# Altium PCB GSH_3dprint_Bed12V_final.PcbDoc (part 2 of 2)
Units mm, origin at the board's own origin, x right, y up, seen from the top; angles counter-clockwise.
Board outline 125 x 120 mm, 2 copper layers (Top Layer, Bottom Layer); 5 components, 3 nets, 10 pads, 0 vias.
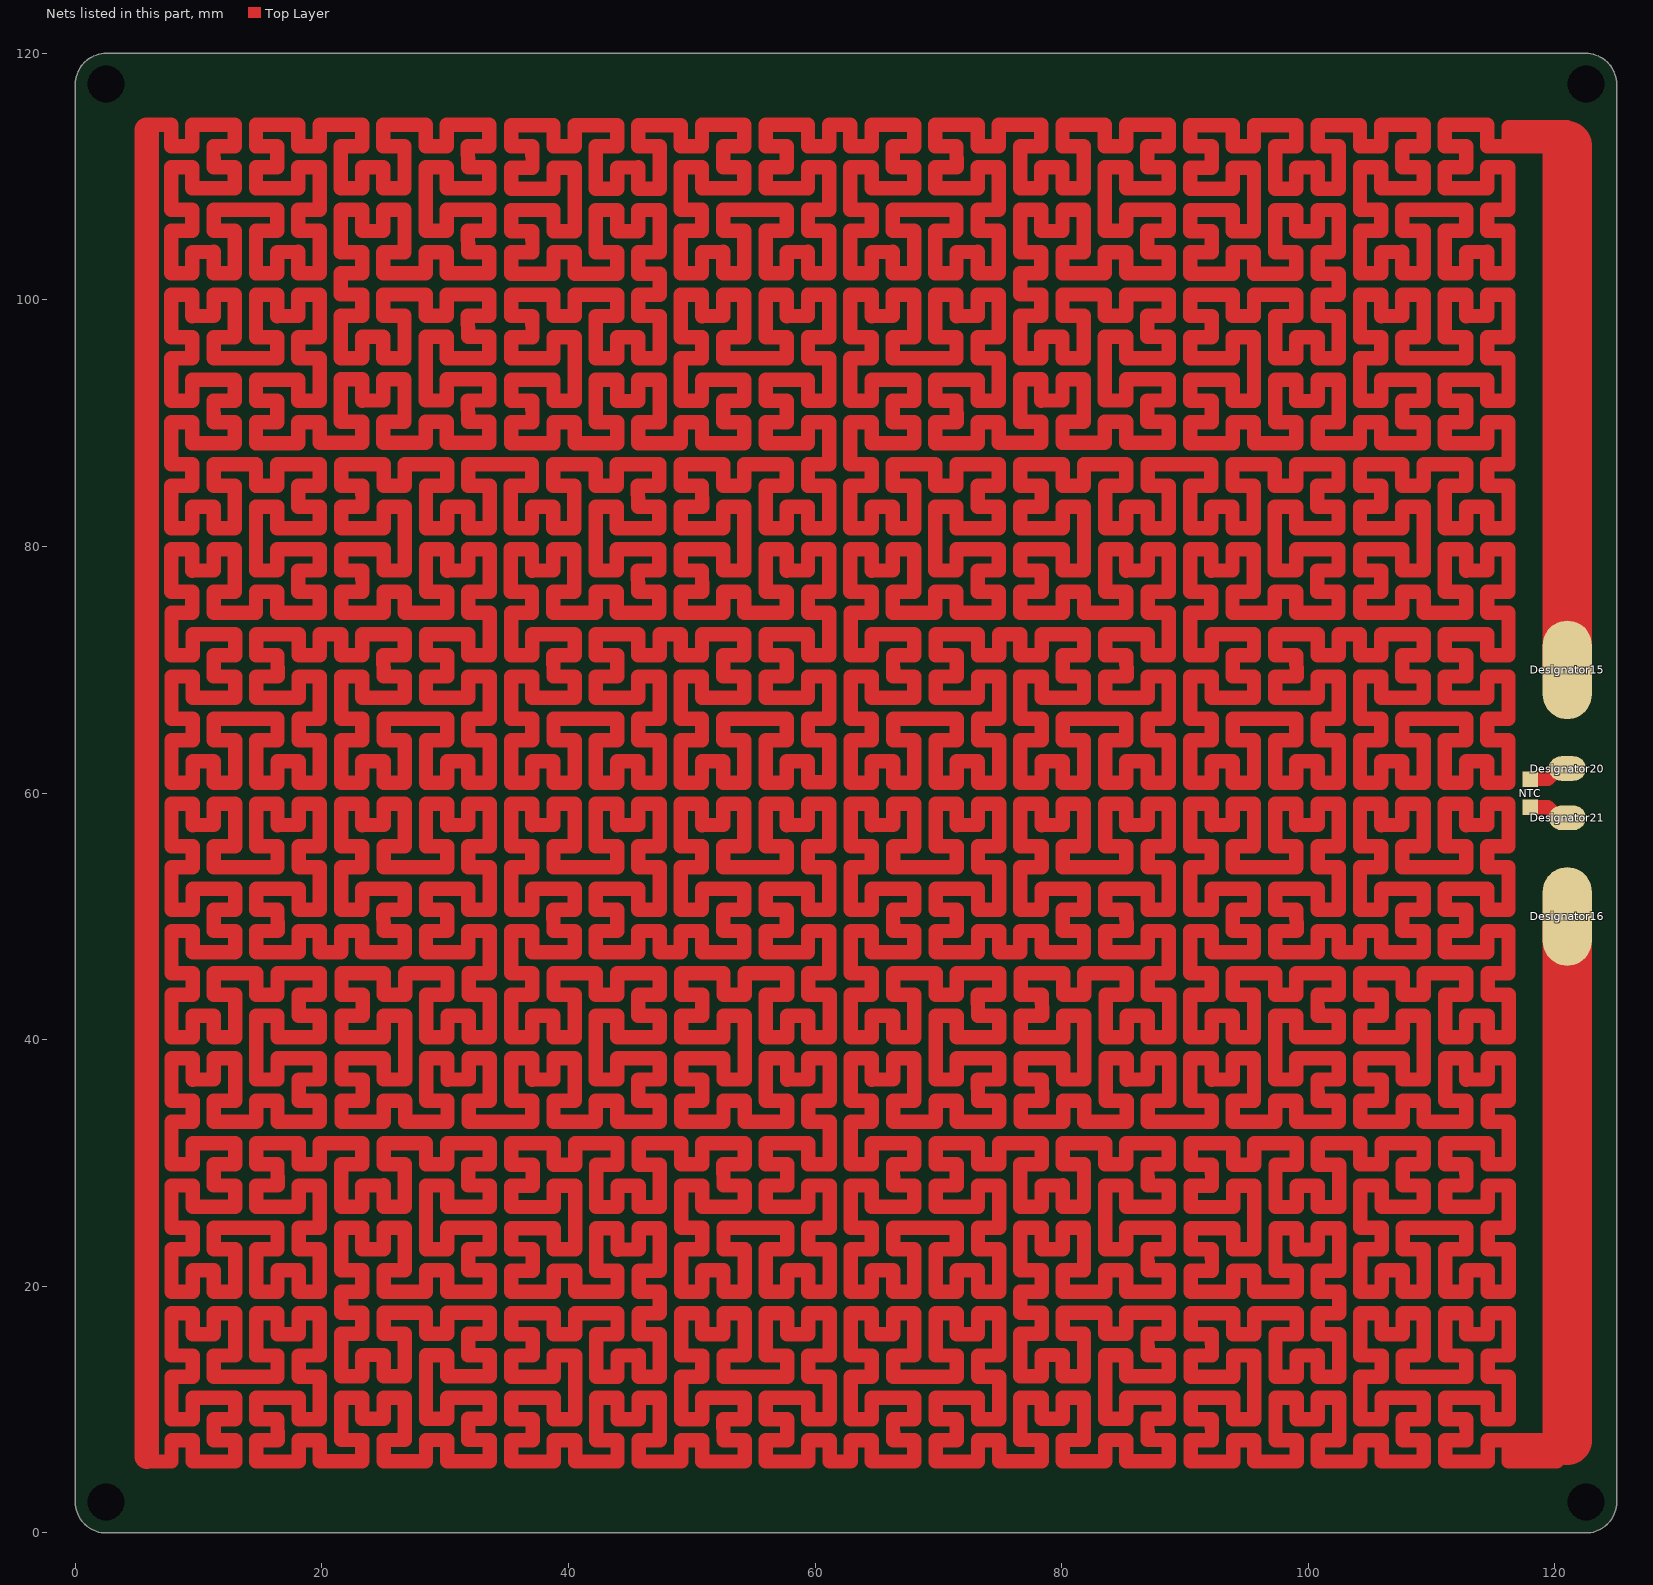
[diagram p2: the nets of this part, all layers, seen from the top]

## Nets (pads, with @x,y where several pads share a name; then routed paths per layer and width w, separated by ;. In a path a pad name is that pad's centre, name@x,y a point inside that pad or via, vN(x,y) a via of type N, cw(c..) or ccw(c..) an arc to the next point about the centre after c; other vN are vias at no path point)
Bed: Designator15.1 Designator16.1 | length 7266.8
  Top Layer w1.17: 5.795,5.795 7.795,5.795 7.795,7.515 9.515,7.515 9.515,5.795 12.955,5.795 12.955,7.515 11.235,7.515 11.224,9.235 ; 5.795,114.205 7.77,114.205 7.77,112.485 9.49,112.485 9.49,114.205 12.93,114.205 12.93,112.485 11.21,112.485 ; 9.49,78.049 11.21,78.06 11.21,79.78 12.93,79.78 12.93,76.34 11.21,76.34 11.21,74.62 14.65,74.62 14.65,76.34 16.37,76.34 16.37,74.62 19.81,74.62 19.81,76.34 18.09,76.34 18.079,78.06 ; 9.49,78.06 9.49,79.78 7.77,79.78 7.77,76.34 9.49,76.34 9.49,74.62 7.795,74.62 7.795,71.18 9.515,71.18 9.515,72.9 12.955,72.9 12.955,71.18 11.235,71.18 ; 9.49,98.689 11.21,98.7 11.21,100.42 12.93,100.42 12.93,96.98 11.21,96.98 11.21,95.26 16.37,95.26 16.37,96.98 14.65,96.98 14.65,100.42 16.37,100.42 16.37,98.7 ; 9.49,98.7 9.49,100.42 7.77,100.42 7.77,96.98 9.49,96.98 9.49,95.26 7.77,95.26 7.77,91.82 9.49,91.82 9.49,93.54 12.93,93.54 12.93,91.82 11.21,91.82 ; 9.515,16.104 11.235,16.115 11.235,17.835 12.955,17.835 12.955,14.395 11.235,14.395 11.235,12.675 16.395,12.675 16.395,14.395 14.675,14.395 14.675,17.835 16.395,17.835 16.395,16.115 ; 9.515,16.115 9.515,17.835 7.795,17.835 7.795,14.395 9.515,14.395 9.515,12.675 7.795,12.675 7.795,9.235 9.515,9.235 9.515,10.955 12.955,10.955 12.955,9.235 11.235,9.235 ; 9.515,36.769 11.235,36.78 11.235,38.5 12.955,38.5 12.955,35.06 11.235,35.06 11.235,33.34 14.675,33.34 14.675,35.06 16.395,35.06 16.395,33.34 19.835,33.34 19.835,35.06 18.115,35.06 18.104,36.78 ; 9.515,36.78 9.515,38.5 7.795,38.5 7.795,35.06 9.515,35.06 9.515,33.34 7.795,33.34 7.795,29.9 9.515,29.9 9.515,31.62 12.955,31.62 12.955,29.9 11.235,29.9 ; 9.515,57.409 11.235,57.42 11.235,59.14 12.955,59.14 12.955,55.7 11.235,55.7 11.235,53.98 16.395,53.98 16.395,55.7 14.675,55.7 14.675,59.14 16.395,59.14 16.395,57.42 ; 9.515,57.42 9.515,59.14 7.795,59.14 7.795,55.7 9.515,55.7 9.515,53.98 7.795,53.98 7.795,50.54 9.515,50.54 9.515,52.26 12.955,52.26 12.955,50.54 11.235,50.54 ; 11.199,91.82 11.21,90.1 12.93,90.1 12.93,88.38 9.49,88.38 9.49,90.1 7.77,90.1 7.77,86.66 9.49,86.66 9.49,84.94 7.77,84.94 7.77,81.5 9.49,81.5 9.49,83.22 11.21,83.231 ; 11.199,112.485 11.21,110.765 12.93,110.765 12.93,109.045 9.49,109.045 9.49,110.765 7.77,110.765 7.77,107.325 9.49,107.325 9.49,105.605 7.77,105.605 7.77,102.165 9.49,102.165 9.49,103.885 11.21,103.896 ; 11.21,83.22 11.21,81.5 12.93,81.5 12.93,84.94 11.21,84.94 11.21,86.66 14.65,86.66 14.65,84.94 16.37,84.94 16.37,86.66 19.81,86.66 19.81,84.94 18.09,84.94 ; 11.21,103.885 11.21,102.165 12.93,102.165 12.93,105.605 11.21,105.605 11.21,107.325 16.37,107.325 16.37,105.605 14.65,105.605 14.65,102.165 16.37,102.165 16.37,103.885 18.09,103.896 ; 11.224,29.9 11.235,28.18 12.955,28.18 12.955,26.46 9.515,26.46 9.515,28.18 7.795,28.18 7.795,24.74 9.515,24.74 9.515,23.02 7.795,23.02 7.795,19.58 9.515,19.58 9.515,21.3 11.235,21.311 ; 11.224,50.54 11.235,48.82 12.955,48.82 12.955,47.1 9.515,47.1 9.515,48.82 7.795,48.82 7.795,45.38 9.515,45.38 9.515,43.66 7.795,43.66 7.795,40.22 9.515,40.22 9.515,41.94 11.235,41.951 ; 11.224,71.18 11.235,69.46 12.955,69.46 12.955,67.74 9.515,67.74 9.515,69.46 7.795,69.46 7.795,66.02 9.515,66.02 9.515,64.3 7.795,64.3 7.795,60.86 9.515,60.86 9.515,62.58 11.235,62.591 ; 11.235,21.3 11.235,19.58 12.955,19.58 12.955,23.02 11.235,23.02 11.235,24.74 16.395,24.74 16.395,23.02 14.675,23.02 14.675,19.58 16.395,19.58 16.395,21.3 18.115,21.311 ; 11.235,41.94 11.235,40.22 12.955,40.22 12.955,43.66 11.235,43.66 11.235,45.38 14.675,45.38 14.675,43.66 16.395,43.66 16.395,45.38 19.835,45.38 19.835,43.66 18.115,43.66 ; 11.235,62.58 11.235,60.86 12.955,60.86 12.955,64.3 11.235,64.3 11.235,66.02 16.395,66.02 16.395,64.3 14.675,64.3 14.675,60.86 16.395,60.86 16.395,62.58 18.115,62.591 ; 16.37,90.1 14.65,90.1 14.65,88.38 18.09,88.38 18.09,90.1 19.81,90.1 19.81,88.405 23.25,88.405 23.25,90.125 21.53,90.125 21.53,93.565 23.25,93.565 23.25,91.845 ; 16.37,98.689 18.09,98.7 18.09,100.42 19.81,100.42 19.81,96.98 18.09,96.98 18.09,95.26 19.81,95.26 19.81,91.82 18.09,91.82 18.09,93.54 14.65,93.54 14.65,91.82 16.37,91.82 16.381,90.1 ; 16.37,110.765 14.65,110.765 14.65,109.045 18.09,109.045 18.09,110.765 19.81,110.765 19.81,107.325 18.09,107.325 18.09,105.605 19.81,105.605 19.81,102.165 18.09,102.165 18.09,103.885 ; 16.381,110.765 16.37,112.485 14.65,112.485 14.65,114.205 18.09,114.205 18.09,112.485 19.81,112.485 19.81,114.205 23.25,114.205 23.25,112.485 21.53,112.485 21.53,109.045 23.25,109.045 23.25,110.765 24.97,110.776 ; 16.395,7.515 14.675,7.515 14.675,5.795 18.115,5.795 18.115,7.515 19.835,7.515 19.835,5.82 23.275,5.82 23.275,7.54 21.555,7.54 21.555,10.98 23.275,10.98 23.275,9.26 ; 16.395,16.104 18.115,16.115 18.115,17.835 19.835,17.835 19.835,14.395 18.115,14.395 18.115,12.675 19.835,12.675 19.835,9.235 18.115,9.235 18.115,10.955 14.675,10.955 14.675,9.235 16.395,9.235 16.406,7.515 ; 16.395,28.18 14.675,28.18 14.675,26.46 18.115,26.46 18.115,28.18 19.835,28.18 19.835,24.74 18.115,24.74 18.115,23.02 19.835,23.02 19.835,19.58 18.115,19.58 18.115,21.3 ; 16.395,48.82 14.675,48.82 14.675,47.1 18.115,47.1 18.115,48.82 19.835,48.82 19.835,47.1 21.555,47.1 21.555,48.82 23.275,48.82 23.275,47.1 26.715,47.1 26.715,48.82 24.995,48.82 24.984,50.54 ; 16.395,57.409 18.115,57.42 18.115,59.14 19.835,59.14 19.835,55.7 18.115,55.7 18.115,53.98 19.835,53.98 19.835,50.54 18.115,50.54 18.115,52.26 14.675,52.26 14.675,50.54 16.395,50.54 16.406,48.82 ; 16.395,69.46 14.675,69.46 14.675,67.74 18.115,67.74 18.115,69.46 19.835,69.46 19.835,66.02 18.115,66.02 18.115,64.3 19.835,64.3 19.835,60.86 18.115,60.86 18.115,62.58 ; 16.406,28.18 16.395,29.9 14.675,29.9 14.675,31.62 18.115,31.62 18.115,29.9 19.835,29.9 19.835,31.62 23.275,31.62 23.275,29.9 21.555,29.9 21.555,26.46 23.275,26.46 23.275,28.18 24.995,28.191 ; 16.406,69.46 16.395,71.18 14.675,71.18 14.675,72.9 18.115,72.9 18.115,71.18 19.835,71.18 19.835,72.9 21.555,72.9 21.555,71.18 23.275,71.18 23.275,72.9 26.715,72.9 26.715,71.18 24.995,71.18 ; 18.079,84.94 18.09,83.22 19.81,83.22 19.81,81.5 16.37,81.5 16.37,83.22 14.65,83.22 14.65,78.06 16.37,78.06 16.37,79.78 19.81,79.78 19.81,78.06 18.09,78.06 ; 18.104,43.66 18.115,41.94 19.835,41.94 19.835,40.22 16.395,40.22 16.395,41.94 14.675,41.94 14.675,36.78 16.395,36.78 16.395,38.5 19.835,38.5 19.835,36.78 18.115,36.78 ; 23.25,91.834 24.97,91.845 24.97,93.565 26.69,93.565 26.69,90.125 24.97,90.125 24.97,88.405 28.41,88.405 28.41,90.125 30.13,90.125 30.13,88.405 33.57,88.405 33.57,90.125 31.85,90.125 31.839,91.845 ; 23.25,105.594 24.97,105.605 24.97,107.325 26.69,107.325 26.69,103.885 24.97,103.885 24.97,102.165 28.41,102.165 28.41,103.885 30.13,103.885 30.13,102.165 33.57,102.165 33.57,103.885 31.85,103.885 31.839,105.605 ; 23.25,105.605 23.25,107.325 21.53,107.325 21.53,103.885 23.25,103.885 23.25,102.165 21.53,102.165 21.53,100.445 23.25,100.445 23.25,98.725 21.53,98.725 21.53,95.285 23.25,95.285 23.25,97.005 24.97,97.016 ; 23.275,9.249 24.995,9.26 24.995,10.98 26.715,10.98 26.715,7.54 24.995,7.54 24.995,5.82 28.435,5.82 28.435,7.54 30.155,7.54 30.155,5.82 33.595,5.82 33.595,7.54 31.875,7.54 31.864,9.26 ; 23.275,23.009 24.995,23.02 24.995,24.74 26.715,24.74 26.715,21.3 24.995,21.3 24.995,19.58 28.435,19.58 28.435,21.3 30.155,21.3 30.155,19.58 33.595,19.58 33.595,21.3 31.875,21.3 31.864,23.02 ; 23.275,23.02 23.275,24.74 21.555,24.74 21.555,21.3 23.275,21.3 23.275,19.58 21.555,19.58 21.555,17.86 23.275,17.86 23.275,16.14 21.555,16.14 21.555,12.7 23.275,12.7 23.275,14.42 24.995,14.431 ; 23.275,57.409 24.995,57.42 24.995,59.14 26.715,59.14 26.715,55.7 24.995,55.7 24.995,53.98 30.155,53.98 30.155,55.7 28.435,55.7 28.435,59.14 30.155,59.14 30.155,57.42 ; 23.275,57.42 23.275,59.14 21.555,59.14 21.555,55.7 23.275,55.7 23.275,53.98 21.555,53.98 21.555,50.54 23.275,50.54 23.275,52.26 26.715,52.26 26.715,50.54 24.995,50.54 ; 23.275,76.34 21.555,76.34 21.555,74.62 24.995,74.62 24.995,76.34 26.715,76.34 26.715,74.62 30.155,74.62 30.155,76.34 28.435,76.34 28.435,79.78 30.155,79.78 30.155,78.06 ; 23.275,83.22 21.555,83.22 21.555,81.5 24.995,81.5 24.995,83.22 26.715,83.22 26.715,78.06 24.995,78.06 24.995,79.78 21.555,79.78 21.555,78.06 23.275,78.06 23.286,76.34 ; 23.286,83.22 23.275,84.94 21.555,84.94 21.555,86.66 24.995,86.66 24.995,84.94 26.715,84.94 26.715,86.66 30.155,86.66 30.155,84.94 28.435,84.94 28.435,81.5 30.155,81.5 30.155,83.22 31.875,83.231 ; 23.3,35.06 21.58,35.06 21.58,33.34 25.02,33.34 25.02,35.06 26.74,35.06 26.74,33.34 30.18,33.34 30.18,35.06 28.46,35.06 28.46,38.5 30.18,38.5 30.18,36.78 ; 23.3,41.94 21.58,41.94 21.58,40.22 25.02,40.22 25.02,41.94 26.74,41.94 26.74,36.78 25.02,36.78 25.02,38.5 21.58,38.5 21.58,36.78 23.3,36.78 23.311,35.06 ; 23.311,41.94 23.3,43.66 21.58,43.66 21.58,45.38 25.02,45.38 25.02,43.66 26.74,43.66 26.74,45.38 30.18,45.38 30.18,43.66 28.46,43.66 28.46,40.22 30.18,40.22 30.18,41.94 31.9,41.951 ; 24.97,97.005 24.97,95.285 26.69,95.285 26.69,98.725 24.97,98.725 24.97,100.445 28.41,100.445 28.41,98.725 30.13,98.725 30.13,100.445 33.57,100.445 33.57,98.725 31.85,98.725 ; 24.97,110.765 24.97,109.045 26.69,109.045 26.69,112.485 24.97,112.485 24.97,114.205 28.41,114.205 28.41,112.485 30.13,112.485 30.13,114.205 33.57,114.205 33.57,112.485 31.85,112.485 ; 24.984,71.18 24.995,69.46 26.715,69.46 26.715,67.74 23.275,67.74 23.275,69.46 21.555,69.46 21.555,66.02 23.275,66.02 23.275,64.3 21.555,64.3 21.555,60.86 23.275,60.86 23.275,62.58 24.995,62.591 ; 24.995,14.42 24.995,12.7 26.715,12.7 26.715,16.14 24.995,16.14 24.995,17.86 28.435,17.86 28.435,16.14 30.155,16.14 30.155,17.86 33.595,17.86 33.595,16.14 31.875,16.14 ; 24.995,28.18 24.995,26.46 26.715,26.46 26.715,29.9 24.995,29.9 24.995,31.62 28.435,31.62 28.435,29.9 30.155,29.9 30.155,31.62 33.595,31.62 33.595,29.9 31.875,29.9 ; 24.995,62.58 24.995,60.86 26.715,60.86 26.715,64.3 24.995,64.3 24.995,66.02 30.155,66.02 30.155,64.3 28.435,64.3 28.435,60.86 30.155,60.86 30.155,62.58 31.875,62.591 ; 30.155,48.82 28.435,48.82 28.435,47.1 31.875,47.1 31.875,48.82 33.595,48.82 33.595,45.38 31.9,45.38 31.9,43.66 33.62,43.66 33.62,40.22 31.9,40.22 31.9,41.94 ; 30.155,57.409 31.875,57.42 31.875,59.14 33.595,59.14 33.595,55.7 31.875,55.7 31.875,53.98 33.595,53.98 33.595,50.54 31.875,50.54 31.875,52.26 28.435,52.26 28.435,50.54 30.155,50.54 30.166,48.82 ; 30.155,69.46 28.435,69.46 28.435,67.74 31.875,67.74 31.875,69.46 33.595,69.46 33.595,66.02 31.875,66.02 31.875,64.3 33.595,64.3 33.595,60.86 31.875,60.86 31.875,62.58 ; 30.155,78.049 31.875,78.06 31.875,79.78 33.595,79.78 33.595,76.34 31.875,76.34 31.875,74.62 33.595,74.62 33.595,71.18 31.875,71.18 31.875,72.9 28.435,72.9 28.435,71.18 30.155,71.18 30.166,69.46 ; 30.18,36.769 31.9,36.78 31.9,38.5 33.62,38.5 33.62,35.06 31.9,35.06 31.9,33.34 37.06,33.34 37.06,35.06 35.34,35.06 35.34,38.5 37.06,38.5 37.06,36.78 ; 31.839,98.725 31.85,97.005 33.57,97.005 33.57,95.285 30.13,95.285 30.13,97.005 28.41,97.005 28.41,91.845 30.13,91.845 30.13,93.565 33.57,93.565 33.57,91.845 31.85,91.845 ; 31.839,112.485 31.85,110.765 33.57,110.765 33.57,109.045 30.13,109.045 30.13,110.765 28.41,110.765 28.41,105.605 30.13,105.605 30.13,107.325 33.57,107.325 33.57,105.605 31.85,105.605 ; 31.864,16.14 31.875,14.42 33.595,14.42 33.595,12.7 30.155,12.7 30.155,14.42 28.435,14.42 28.435,9.26 30.155,9.26 30.155,10.98 33.595,10.98 33.595,9.26 31.875,9.26 ; 31.864,29.9 31.875,28.18 33.595,28.18 33.595,26.46 30.155,26.46 30.155,28.18 28.435,28.18 28.435,23.02 30.155,23.02 30.155,24.74 33.595,24.74 33.595,23.02 31.875,23.02 ; 31.875,83.22 31.875,81.5 33.595,81.5 33.595,84.94 31.875,84.94 31.875,86.66 37.035,86.66 37.035,84.94 35.315,84.94 35.315,81.5 37.035,81.5 37.035,83.22 38.755,83.231 ; 37.035,78.049 38.755,78.06 38.755,79.78 40.475,79.78 40.475,76.34 38.755,76.34 38.755,74.62 42.195,74.62 42.195,76.34 43.915,76.34 43.915,74.62 47.355,74.62 47.355,76.34 45.635,76.34 45.624,78.06 ; 37.035,78.06 37.035,79.78 35.315,79.78 35.315,76.34 37.035,76.34 37.035,74.62 35.34,74.62 35.34,71.18 37.06,71.18 37.06,72.9 40.5,72.9 40.5,71.18 38.78,71.18 ; 37.06,36.769 38.78,36.78 38.78,38.5 40.5,38.5 40.5,35.06 38.78,35.06 38.78,33.34 42.22,33.34 42.22,35.06 43.94,35.06 43.94,33.34 47.38,33.34 47.38,35.06 45.66,35.06 45.649,36.78 ; 37.06,57.409 38.78,57.42 38.78,59.14 40.5,59.14 40.5,55.7 38.78,55.7 38.78,53.98 43.94,53.98 43.94,55.7 42.22,55.7 42.22,59.14 43.94,59.14 43.94,57.42 ; 37.06,57.42 37.06,59.14 35.34,59.14 35.34,55.7 37.06,55.7 37.06,53.98 35.34,53.98 35.34,50.54 37.06,50.54 37.06,52.26 40.5,52.26 40.5,50.54 38.78,50.54 ; 37.06,90.1 35.34,90.1 35.34,88.38 38.78,88.38 38.78,90.1 40.5,90.1 40.5,88.38 43.94,88.38 43.94,90.1 42.22,90.1 42.22,93.54 43.94,93.54 43.94,91.82 ; 37.06,96.98 35.34,96.98 35.34,95.26 38.78,95.26 38.78,96.98 40.5,96.98 40.5,91.82 38.78,91.82 38.78,93.54 35.34,93.54 35.34,91.82 37.06,91.82 37.071,90.1 ; 37.06,103.86 35.34,103.86 35.34,102.14 38.78,102.14 38.78,103.86 40.5,103.86 40.5,102.14 43.94,102.14 43.94,103.86 42.22,103.86 42.22,107.3 43.94,107.3 43.94,105.58 ; 37.06,110.74 35.34,110.74 35.34,109.02 38.78,109.02 38.78,110.74 40.5,110.74 40.5,105.58 38.78,105.58 38.78,107.3 35.34,107.3 35.34,105.58 37.06,105.58 37.071,103.86 ; 37.071,96.98 37.06,98.7 35.34,98.7 35.34,100.42 38.78,100.42 38.78,98.7 40.5,98.7 40.5,100.42 43.94,100.42 43.94,98.7 42.22,98.7 42.22,95.26 43.94,95.26 43.94,96.98 45.66,96.991 ; 37.071,110.74 37.06,112.46 35.34,112.46 35.34,114.18 38.78,114.18 38.78,112.46 40.5,112.46 40.5,114.18 43.94,114.18 43.94,112.46 42.22,112.46 42.22,109.02 43.94,109.02 43.94,110.74 45.66,110.751 ; 37.085,7.515 35.365,7.515 35.365,5.795 38.805,5.795 38.805,7.515 40.525,7.515 40.525,5.795 43.965,5.795 43.965,7.515 42.245,7.515 42.245,10.955 43.965,10.955 43.965,9.235 ; 37.085,14.395 35.365,14.395 35.365,12.675 38.805,12.675 38.805,14.395 40.525,14.395 40.525,9.235 38.805,9.235 38.805,10.955 35.365,10.955 35.365,9.235 37.085,9.235 37.096,7.515 ; 37.085,21.275 35.365,21.275 35.365,19.555 38.805,19.555 38.805,21.275 40.525,21.275 40.525,19.555 43.965,19.555 43.965,21.275 42.245,21.275 42.245,24.715 43.965,24.715 43.965,22.995 ; 37.085,28.155 35.365,28.155 35.365,26.435 38.805,26.435 38.805,28.155 40.525,28.155 40.525,22.995 38.805,22.995 38.805,24.715 35.365,24.715 35.365,22.995 37.085,22.995 37.096,21.275 ; 37.096,14.395 37.085,16.115 35.365,16.115 35.365,17.835 38.805,17.835 38.805,16.115 40.525,16.115 40.525,17.835 43.965,17.835 43.965,16.115 42.245,16.115 42.245,12.675 43.965,12.675 43.965,14.395 45.685,14.406 ; 37.096,28.155 37.085,29.875 35.365,29.875 35.365,31.595 38.805,31.595 38.805,29.875 40.525,29.875 40.525,31.595 43.965,31.595 43.965,29.875 42.245,29.875 42.245,26.435 43.965,26.435 43.965,28.155 45.685,28.166 ; 38.755,83.22 38.755,81.5 40.475,81.5 40.475,84.94 38.755,84.94 38.755,86.66 42.195,86.66 42.195,84.94 43.915,84.94 43.915,86.66 47.355,86.66 47.355,84.94 45.635,84.94 ; 38.769,50.54 38.78,48.82 40.5,48.82 40.5,47.1 37.06,47.1 37.06,48.82 35.34,48.82 35.34,45.38 37.06,45.38 37.06,43.66 35.34,43.66 35.34,40.22 37.06,40.22 37.06,41.94 38.78,41.951 ; 38.769,71.18 38.78,69.46 40.5,69.46 40.5,67.74 37.06,67.74 37.06,69.46 35.34,69.46 35.34,66.02 37.06,66.02 37.06,64.3 35.34,64.3 35.34,60.86 37.06,60.86 37.06,62.58 38.78,62.591 ; 38.78,41.94 38.78,40.22 40.5,40.22 40.5,43.66 38.78,43.66 38.78,45.38 42.22,45.38 42.22,43.66 43.94,43.66 43.94,45.38 47.38,45.38 47.38,43.66 45.66,43.66 ; 38.78,62.58 38.78,60.86 40.5,60.86 40.5,64.3 38.78,64.3 38.78,66.02 43.94,66.02 43.94,64.3 42.22,64.3 42.22,60.86 43.94,60.86 43.94,62.58 45.66,62.591 ; 43.94,48.82 42.22,48.82 42.22,47.1 45.66,47.1 45.66,48.82 47.38,48.82 47.38,47.1 49.1,47.1 49.1,48.82 50.82,48.82 50.82,47.1 54.26,47.1 54.26,48.82 52.54,48.82 52.529,50.54 ; 43.94,57.409 45.66,57.42 45.66,59.14 47.38,59.14 47.38,55.7 45.66,55.7 45.66,53.98 47.38,53.98 47.38,50.54 45.66,50.54 45.66,52.26 42.22,52.26 42.22,50.54 43.94,50.54 43.951,48.82 ; 43.94,69.46 42.22,69.46 42.22,67.74 45.66,67.74 45.66,69.46 47.38,69.46 47.38,66.02 45.66,66.02 45.66,64.3 47.38,64.3 47.38,60.86 45.66,60.86 45.66,62.58 ; 43.94,91.809 45.66,91.82 45.66,93.54 47.38,93.54 47.38,90.1 45.66,90.1 45.66,88.38 49.1,88.38 49.1,90.1 50.82,90.1 50.82,88.38 54.26,88.38 54.26,90.1 52.54,90.1 52.529,91.82 ; 43.94,105.569 45.66,105.58 45.66,107.3 47.38,107.3 47.38,103.86 45.66,103.86 45.66,102.14 47.38,102.14 47.38,100.42 45.66,100.42 45.66,98.7 47.38,98.7 47.38,95.26 45.66,95.26 45.66,96.98 ; 43.951,69.46 43.94,71.18 42.22,71.18 42.22,72.9 45.66,72.9 45.66,71.18 47.38,71.18 47.38,72.9 49.1,72.9 49.1,71.18 50.82,71.18 50.82,72.9 54.26,72.9 54.26,71.18 52.54,71.18 ; 43.965,9.224 45.685,9.235 45.685,10.955 47.405,10.955 47.405,7.515 45.685,7.515 45.685,5.795 49.125,5.795 49.125,7.515 50.845,7.515 50.845,5.795 54.285,5.795 54.285,7.515 52.565,7.515 52.554,9.235 ; 43.965,22.984 45.685,22.995 45.685,24.715 47.405,24.715 47.405,21.275 45.685,21.275 45.685,19.555 47.405,19.555 47.405,17.835 45.685,17.835 45.685,16.115 47.405,16.115 47.405,12.675 45.685,12.675 45.685,14.395 ; 45.624,84.94 45.635,83.22 47.355,83.22 47.355,81.5 43.915,81.5 43.915,83.22 42.195,83.22 42.195,78.06 43.915,78.06 43.915,79.78 47.355,79.78 47.355,78.06 45.635,78.06 ; 45.649,43.66 45.66,41.94 47.38,41.94 47.38,40.22 43.94,40.22 43.94,41.94 42.22,41.94 42.22,36.78 43.94,36.78 43.94,38.5 47.38,38.5 47.38,36.78 45.66,36.78 ; 45.66,110.74 45.66,109.02 47.38,109.02 47.38,112.46 45.66,112.46 45.66,114.18 49.1,114.18 49.1,112.485 50.82,112.485 50.82,114.205 54.26,114.205 54.26,112.485 52.54,112.485 ; 45.685,28.155 45.685,26.435 47.405,26.435 47.405,29.875 45.685,29.875 45.685,31.595 49.125,31.595 49.125,29.9 50.845,29.9 50.845,31.62 54.285,31.62 54.285,29.9 52.565,29.9 ; 50.82,57.409 52.54,57.42 52.54,59.14 54.26,59.14 54.26,55.7 52.54,55.7 52.54,53.98 57.7,53.98 57.7,55.7 55.98,55.7 55.98,59.14 57.7,59.14 57.7,57.42 ; 50.82,57.42 50.82,59.14 49.1,59.14 49.1,55.7 50.82,55.7 50.82,53.98 49.1,53.98 49.1,50.54 50.82,50.54 50.82,52.26 54.26,52.26 54.26,50.54 52.54,50.54 ; 50.82,76.34 49.1,76.34 49.1,74.62 52.54,74.62 52.54,76.34 54.26,76.34 54.26,74.62 57.7,74.62 57.7,76.34 55.98,76.34 55.98,79.78 57.7,79.78 57.7,78.06 ; 50.82,83.22 49.1,83.22 49.1,81.5 52.54,81.5 52.54,83.22 54.26,83.22 54.26,78.06 52.54,78.06 52.54,79.78 49.1,79.78 49.1,78.06 50.82,78.06 50.831,76.34 ; 50.82,98.689 52.54,98.7 52.54,100.42 54.26,100.42 54.26,96.98 52.54,96.98 52.54,95.26 57.7,95.26 57.7,96.98 55.98,96.98 55.98,100.42 57.7,100.42 57.7,98.7 ; 50.82,98.7 50.82,100.42 49.1,100.42 49.1,96.98 50.82,96.98 50.82,95.26 49.1,95.26 49.1,91.82 50.82,91.82 50.82,93.54 54.26,93.54 54.26,91.82 52.54,91.82 ; 50.831,83.22 50.82,84.94 49.1,84.94 49.1,86.66 52.54,86.66 52.54,84.94 54.26,84.94 54.26,86.66 57.7,86.66 57.7,84.94 55.98,84.94 55.98,81.5 57.7,81.5 57.7,83.22 59.42,83.231 ; 50.845,16.104 52.565,16.115 52.565,17.835 54.285,17.835 54.285,14.395 52.565,14.395 52.565,12.675 57.725,12.675 57.725,14.395 56.005,14.395 56.005,17.835 57.725,17.835 57.725,16.115 ; 50.845,16.115 50.845,17.835 49.125,17.835 49.125,14.395 50.845,14.395 50.845,12.675 49.125,12.675 49.125,9.235 50.845,9.235 50.845,10.955 54.285,10.955 54.285,9.235 52.565,9.235 ; 50.845,35.06 49.125,35.06 49.125,33.34 52.565,33.34 52.565,35.06 54.285,35.06 54.285,33.34 57.725,33.34 57.725,35.06 56.005,35.06 56.005,38.5 57.725,38.5 57.725,36.78 ; 50.845,41.94 49.125,41.94 49.125,40.22 52.565,40.22 52.565,41.94 54.285,41.94 54.285,36.78 52.565,36.78 52.565,38.5 49.125,38.5 49.125,36.78 50.845,36.78 50.856,35.06 ; 50.856,41.94 50.845,43.66 49.125,43.66 49.125,45.38 52.565,45.38 52.565,43.66 54.285,43.66 54.285,45.38 57.725,45.38 57.725,43.66 56.005,43.66 56.005,40.22 57.725,40.22 57.725,41.94 59.445,41.951 ; 52.529,71.18 52.54,69.46 54.26,69.46 54.26,67.74 50.82,67.74 50.82,69.46 49.1,69.46 49.1,66.02 50.82,66.02 50.82,64.3 49.1,64.3 49.1,60.86 50.82,60.86 50.82,62.58 52.54,62.591 ; 52.529,112.485 52.54,110.765 54.26,110.765 54.26,109.045 50.82,109.045 50.82,110.765 49.1,110.765 49.1,107.325 50.82,107.325 50.82,105.605 49.1,105.605 49.1,102.165 50.82,102.165 50.82,103.885 52.54,103.896 ; 52.54,62.58 52.54,60.86 54.26,60.86 54.26,64.3 52.54,64.3 52.54,66.02 57.7,66.02 57.7,64.3 55.98,64.3 55.98,60.86 57.7,60.86 57.7,62.58 59.42,62.591 59.42,60.871 61.14,60.871 61.14,64.3 59.42,64.3 59.42,66.02 61.14,66.02 61.14,69.46 59.42,69.46 59.42,67.74 55.98,67.74 55.98,69.46 57.7,69.46 ; 52.54,103.885 52.54,102.165 54.26,102.165 54.26,105.605 52.54,105.605 52.54,107.325 57.7,107.325 57.7,105.605 55.98,105.605 55.98,102.165 57.7,102.165 57.7,103.885 59.42,103.896 ; 52.554,29.9 52.565,28.18 54.285,28.18 54.285,26.46 50.845,26.46 50.845,28.18 49.125,28.18 49.125,24.74 50.845,24.74 50.845,23.02 49.125,23.02 49.125,19.58 50.845,19.58 50.845,21.3 52.565,21.311 ; 52.565,21.3 52.565,19.58 54.285,19.58 54.285,23.02 52.565,23.02 52.565,24.74 57.725,24.74 57.725,23.02 56.005,23.02 56.005,19.58 57.725,19.58 57.725,21.3 59.445,21.311 ; 57.7,48.82 55.98,48.82 55.98,47.1 59.42,47.1 59.42,48.82 61.14,48.82 61.14,45.38 59.445,45.38 59.445,43.66 61.165,43.66 61.165,40.22 59.445,40.22 59.445,41.94 ; 57.7,57.409 59.42,57.42 59.42,59.14 61.14,59.14 61.14,55.7 59.42,55.7 59.42,53.98 61.14,53.98 61.14,50.54 59.42,50.54 59.42,52.26 55.98,52.26 55.98,50.54 57.7,50.54 57.711,48.82 ; 57.7,78.049 59.42,78.06 59.42,79.78 61.14,79.78 61.14,76.34 59.42,76.34 59.42,74.62 61.14,74.62 61.14,71.18 59.42,71.18 59.42,72.9 55.98,72.9 55.98,71.18 57.7,71.18 57.711,69.46 ; 57.7,90.1 55.98,90.1 55.98,88.38 59.42,88.38 59.42,90.1 61.14,90.1 61.14,86.66 59.42,86.66 59.42,84.94 61.14,84.94 61.14,81.5 59.42,81.5 59.42,83.22 ; 57.7,98.689 59.42,98.7 59.42,100.42 61.14,100.42 61.14,96.98 59.42,96.98 59.42,95.26 61.14,95.26 61.14,91.82 59.42,91.82 59.42,93.54 55.98,93.54 55.98,91.82 57.7,91.82 57.711,90.1 ; 57.7,110.765 55.98,110.765 55.98,109.045 59.42,109.045 59.42,110.765 61.14,110.765 61.14,107.325 59.42,107.325 59.42,105.605 61.14,105.605 61.14,102.165 59.42,102.165 59.42,103.885 ; 57.711,110.765 57.7,112.485 55.98,112.485 55.98,114.205 59.42,114.205 59.42,112.485 61.14,112.485 61.14,114.205 62.86,114.205 62.86,112.485 64.58,112.485 64.58,114.205 68.02,114.205 68.02,112.485 66.3,112.485 ; 57.725,7.515 56.005,7.515 56.005,5.795 59.445,5.795 59.445,7.515 61.165,7.515 61.165,5.795 62.885,5.795 62.885,7.515 64.605,7.515 64.605,5.795 68.045,5.795 68.045,7.515 66.325,7.515 66.314,9.235 ; 57.725,16.104 59.445,16.115 59.445,17.835 61.165,17.835 61.165,14.395 59.445,14.395 59.445,12.675 61.165,12.675 61.165,9.235 59.445,9.235 59.445,10.955 56.005,10.955 56.005,9.235 57.725,9.235 57.736,7.515 ; 57.725,28.18 56.005,28.18 56.005,26.46 59.445,26.46 59.445,28.18 61.165,28.18 61.165,24.74 59.445,24.74 59.445,23.02 61.165,23.02 61.165,19.58 59.445,19.58 59.445,21.3 ; 57.725,36.769 59.445,36.78 59.445,38.5 61.165,38.5 61.165,35.06 59.445,35.06 59.445,33.34 61.165,33.34 61.165,29.9 59.445,29.9 59.445,31.62 56.005,31.62 56.005,29.9 57.725,29.9 57.736,28.18 ; 64.58,78.049 66.3,78.06 66.3,79.78 68.02,79.78 68.02,76.34 66.3,76.34 66.3,74.62 69.74,74.62 69.74,76.34 71.46,76.34 71.46,74.62 74.9,74.62 74.9,76.34 73.18,76.34 73.169,78.06 ; 64.58,78.06 64.58,79.78 62.86,79.78 62.86,76.34 64.58,76.34 64.58,74.62 62.885,74.62 62.885,71.18 64.605,71.18 64.605,72.9 68.045,72.9 68.045,71.18 66.325,71.18 ; 64.58,98.689 66.3,98.7 66.3,100.42 68.02,100.42 68.02,96.98 66.3,96.98 66.3,95.26 71.46,95.26 71.46,96.98 69.74,96.98 69.74,100.42 71.46,100.42 71.46,98.7 ; 64.58,98.7 64.58,100.42 62.86,100.42 62.86,96.98 64.58,96.98 64.58,95.26 62.86,95.26 62.86,91.82 64.58,91.82 64.58,93.54 68.02,93.54 68.02,91.82 66.3,91.82 ; 64.605,16.104 66.325,16.115 66.325,17.835 68.045,17.835 68.045,14.395 66.325,14.395 66.325,12.675 71.485,12.675 71.485,14.395 69.765,14.395 69.765,17.835 71.485,17.835 71.485,16.115 ; 64.605,16.115 64.605,17.835 62.885,17.835 62.885,14.395 64.605,14.395 64.605,12.675 62.885,12.675 62.885,9.235 64.605,9.235 64.605,10.955 68.045,10.955 68.045,9.235 66.325,9.235 ; 64.605,36.769 66.325,36.78 66.325,38.5 68.045,38.5 68.045,35.06 66.325,35.06 66.325,33.34 69.765,33.34 69.765,35.06 71.485,35.06 71.485,33.34 74.925,33.34 74.925,35.06 73.205,35.06 73.194,36.78 ; 64.605,36.78 64.605,38.5 62.885,38.5 62.885,35.06 64.605,35.06 64.605,33.34 62.885,33.34 62.885,29.9 64.605,29.9 64.605,31.62 68.045,31.62 68.045,29.9 66.325,29.9 ; 64.605,57.409 66.325,57.42 66.325,59.14 68.045,59.14 68.045,55.7 66.325,55.7 66.325,53.98 71.485,53.98 71.485,55.7 69.765,55.7 69.765,59.14 71.485,59.14 71.485,57.42 ; 64.605,57.42 64.605,59.14 62.885,59.14 62.885,55.7 64.605,55.7 64.605,53.98 62.885,53.98 62.885,50.54 64.605,50.54 64.605,52.26 68.045,52.26 68.045,50.54 66.325,50.54 ; 66.289,91.82 66.3,90.1 68.02,90.1 68.02,88.38 64.58,88.38 64.58,90.1 62.86,90.1 62.86,86.66 64.58,86.66 64.58,84.94 62.86,84.94 62.86,81.5 64.58,81.5 64.58,83.22 66.3,83.231 ; 66.289,112.485 66.3,110.765 68.02,110.765 68.02,109.045 64.58,109.045 64.58,110.765 62.86,110.765 62.86,107.325 64.58,107.325 64.58,105.605 62.86,105.605 62.86,102.165 64.58,102.165 64.58,103.885 66.3,103.896 ; 66.3,83.22 66.3,81.5 68.02,81.5 68.02,84.94 66.3,84.94 66.3,86.66 69.74,86.66 69.74,84.94 71.46,84.94 71.46,86.66 74.9,86.66 74.9,84.94 73.18,84.94 ; 66.3,103.885 66.3,102.165 68.02,102.165 68.02,105.605 66.3,105.605 66.3,107.325 71.46,107.325 71.46,105.605 69.74,105.605 69.74,102.165 71.46,102.165 71.46,103.885 73.18,103.896 ; 66.314,29.9 66.325,28.18 68.045,28.18 68.045,26.46 64.605,26.46 64.605,28.18 62.885,28.18 62.885,24.74 64.605,24.74 64.605,23.02 62.885,23.02 62.885,19.58 64.605,19.58 64.605,21.3 66.325,21.311 ; 66.314,50.54 66.325,48.82 68.045,48.82 68.045,47.1 64.605,47.1 64.605,48.82 62.885,48.82 62.885,45.38 64.605,45.38 64.605,43.66 62.885,43.66 62.885,40.22 64.605,40.22 64.605,41.94 66.325,41.951 ; 66.314,71.18 66.325,69.46 68.045,69.46 68.045,67.74 64.605,67.74 64.605,69.46 62.885,69.46 62.885,66.02 64.605,66.02 64.605,64.3 62.885,64.3 62.885,60.86 64.605,60.86 64.605,62.58 66.325,62.591 ; 66.325,21.3 66.325,19.58 68.045,19.58 68.045,23.02 66.325,23.02 66.325,24.74 71.485,24.74 71.485,23.02 69.765,23.02 69.765,19.58 71.485,19.58 71.485,21.3 73.205,21.311 ; 66.325,41.94 66.325,40.22 68.045,40.22 68.045,43.66 66.325,43.66 66.325,45.38 69.765,45.38 69.765,43.66 71.485,43.66 71.485,45.38 74.925,45.38 74.925,43.66 73.205,43.66 ; 66.325,62.58 66.325,60.86 68.045,60.86 68.045,64.3 66.325,64.3 66.325,66.02 71.485,66.02 71.485,64.3 69.765,64.3 69.765,60.86 71.485,60.86 71.485,62.58 73.205,62.591 ; 71.46,90.1 69.74,90.1 69.74,88.38 73.18,88.38 73.18,90.1 74.9,90.1 74.9,88.405 78.34,88.405 78.34,90.125 76.62,90.125 76.62,93.565 78.34,93.565 78.34,91.845 ; 71.46,98.689 73.18,98.7 73.18,100.42 74.9,100.42 74.9,96.98 73.18,96.98 73.18,95.26 74.9,95.26 74.9,91.82 73.18,91.82 73.18,93.54 69.74,93.54 69.74,91.82 71.46,91.82 71.471,90.1 ; 71.46,110.765 69.74,110.765 69.74,109.045 73.18,109.045 73.18,110.765 74.9,110.765 74.9,107.325 73.18,107.325 73.18,105.605 74.9,105.605 74.9,102.165 73.18,102.165 73.18,103.885 ; 71.471,110.765 71.46,112.485 69.74,112.485 69.74,114.205 73.18,114.205 73.18,112.485 74.9,112.485 74.9,114.205 78.34,114.205 78.34,112.485 76.62,112.485 76.62,109.045 78.34,109.045 78.34,110.765 80.06,110.776 ; 71.485,7.515 69.765,7.515 69.765,5.795 73.205,5.795 73.205,7.515 74.925,7.515 74.925,5.82 78.365,5.82 78.365,7.54 76.645,7.54 76.645,10.98 78.365,10.98 78.365,9.26 ; 71.485,16.104 73.205,16.115 73.205,17.835 74.925,17.835 74.925,14.395 73.205,14.395 73.205,12.675 74.925,12.675 74.925,9.235 73.205,9.235 73.205,10.955 69.765,10.955 69.765,9.235 71.485,9.235 71.496,7.515 ; 71.485,28.18 69.765,28.18 69.765,26.46 73.205,26.46 73.205,28.18 74.925,28.18 74.925,24.74 73.205,24.74 73.205,23.02 74.925,23.02 74.925,19.58 73.205,19.58 73.205,21.3 ; 71.485,48.82 69.765,48.82 69.765,47.1 73.205,47.1 73.205,48.82 74.925,48.82 74.925,47.1 76.645,47.1 76.645,48.82 78.365,48.82 78.365,47.1 81.805,47.1 81.805,48.82 80.085,48.82 80.074,50.54 ; 71.485,57.409 73.205,57.42 73.205,59.14 74.925,59.14 74.925,55.7 73.205,55.7 73.205,53.98 74.925,53.98 74.925,50.54 73.205,50.54 73.205,52.26 69.765,52.26 69.765,50.54 71.485,50.54 71.496,48.82 ; 71.485,69.46 69.765,69.46 69.765,67.74 73.205,67.74 73.205,69.46 74.925,69.46 74.925,66.02 73.205,66.02 73.205,64.3 74.925,64.3 74.925,60.86 73.205,60.86 73.205,62.58 ; 71.496,28.18 71.485,29.9 69.765,29.9 69.765,31.62 73.205,31.62 73.205,29.9 74.925,29.9 74.925,31.62 78.365,31.62 78.365,29.9 76.645,29.9 76.645,26.46 78.365,26.46 78.365,28.18 80.085,28.191 ; 71.496,69.46 71.485,71.18 69.765,71.18 69.765,72.9 73.205,72.9 73.205,71.18 74.925,71.18 74.925,72.9 76.645,72.9 76.645,71.18 78.365,71.18 78.365,72.9 81.805,72.9 81.805,71.18 80.085,71.18 ; 73.169,84.94 73.18,83.22 74.9,83.22 74.9,81.5 71.46,81.5 71.46,83.22 69.74,83.22 69.74,78.06 71.46,78.06 71.46,79.78 74.9,79.78 74.9,78.06 73.18,78.06 ; 73.194,43.66 73.205,41.94 74.925,41.94 74.925,40.22 71.485,40.22 71.485,41.94 69.765,41.94 69.765,36.78 71.485,36.78 71.485,38.5 74.925,38.5 74.925,36.78 73.205,36.78 ; 78.34,91.834 80.06,91.845 80.06,93.565 81.78,93.565 81.78,90.125 80.06,90.125 80.06,88.405 83.5,88.405 83.5,90.125 85.22,90.125 85.22,88.405 88.66,88.405 88.66,90.125 86.94,90.125 86.929,91.845 ; 78.34,105.594 80.06,105.605 80.06,107.325 81.78,107.325 81.78,103.885 80.06,103.885 80.06,102.165 83.5,102.165 83.5,103.885 85.22,103.885 85.22,102.165 88.66,102.165 88.66,103.885 86.94,103.885 86.929,105.605 ; 78.34,105.605 78.34,107.325 76.62,107.325 76.62,103.885 78.34,103.885 78.34,102.165 76.62,102.165 76.62,100.445 78.34,100.445 78.34,98.725 76.62,98.725 76.62,95.285 78.34,95.285 78.34,97.005 80.06,97.016 ; 78.365,9.249 80.085,9.26 80.085,10.98 81.805,10.98 81.805,7.54 80.085,7.54 80.085,5.82 83.525,5.82 83.525,7.54 85.245,7.54 85.245,5.82 88.685,5.82 88.685,7.54 86.965,7.54 86.954,9.26 ; 78.365,23.009 80.085,23.02 80.085,24.74 81.805,24.74 81.805,21.3 80.085,21.3 80.085,19.58 83.525,19.58 83.525,21.3 85.245,21.3 85.245,19.58 88.685,19.58 88.685,21.3 86.965,21.3 86.954,23.02 ; 78.365,23.02 78.365,24.74 76.645,24.74 76.645,21.3 78.365,21.3 78.365,19.58 76.645,19.58 76.645,17.86 78.365,17.86 78.365,16.14 76.645,16.14 76.645,12.7 78.365,12.7 78.365,14.42 80.085,14.431 ; 78.365,57.409 80.085,57.42 80.085,59.14 81.805,59.14 81.805,55.7 80.085,55.7 80.085,53.98 85.245,53.98 85.245,55.7 83.525,55.7 83.525,59.14 85.245,59.14 85.245,57.42 ; 78.365,57.42 78.365,59.14 76.645,59.14 76.645,55.7 78.365,55.7 78.365,53.98 76.645,53.98 76.645,50.54 78.365,50.54 78.365,52.26 81.805,52.26 81.805,50.54 80.085,50.54 ; 78.365,76.34 76.645,76.34 76.645,74.62 80.085,74.62 80.085,76.34 81.805,76.34 81.805,74.62 85.245,74.62 85.245,76.34 83.525,76.34 83.525,79.78 85.245,79.78 85.245,78.06 ; 78.365,83.22 76.645,83.22 76.645,81.5 80.085,81.5 80.085,83.22 81.805,83.22 81.805,78.06 80.085,78.06 80.085,79.78 76.645,79.78 76.645,78.06 78.365,78.06 78.376,76.34 ; 78.376,83.22 78.365,84.94 76.645,84.94 76.645,86.66 80.085,86.66 80.085,84.94 81.805,84.94 81.805,86.66 85.245,86.66 85.245,84.94 83.525,84.94 83.525,81.5 85.245,81.5 85.245,83.22 86.965,83.231 ; 78.39,35.06 76.67,35.06 76.67,33.34 80.11,33.34 80.11,35.06 81.83,35.06 81.83,33.34 85.27,33.34 85.27,35.06 83.55,35.06 83.55,38.5 85.27,38.5 85.27,36.78 ; 78.39,41.94 76.67,41.94 76.67,40.22 80.11,40.22 80.11,41.94 81.83,41.94 81.83,36.78 80.11,36.78 80.11,38.5 76.67,38.5 76.67,36.78 78.39,36.78 78.401,35.06 ; 78.401,41.94 78.39,43.66 76.67,43.66 76.67,45.38 80.11,45.38 80.11,43.66 81.83,43.66 81.83,45.38 85.27,45.38 85.27,43.66 83.55,43.66 83.55,40.22 85.27,40.22 85.27,41.94 86.99,41.951 ; 80.06,97.005 80.06,95.285 81.78,95.285 81.78,98.725 80.06,98.725 80.06,100.445 83.5,100.445 83.5,98.725 85.22,98.725 85.22,100.445 88.66,100.445 88.66,98.725 86.94,98.725 ; 80.06,110.765 80.06,109.045 81.78,109.045 81.78,112.485 80.06,112.485 80.06,114.205 83.5,114.205 83.5,112.485 85.22,112.485 85.22,114.205 88.66,114.205 88.66,112.485 86.94,112.485 ; 80.074,71.18 80.085,69.46 81.805,69.46 81.805,67.74 78.365,67.74 78.365,69.46 76.645,69.46 76.645,66.02 78.365,66.02 78.365,64.3 76.645,64.3 76.645,60.86 78.365,60.86 78.365,62.58 80.085,62.591 ; 80.085,14.42 80.085,12.7 81.805,12.7 81.805,16.14 80.085,16.14 80.085,17.86 83.525,17.86 83.525,16.14 85.245,16.14 85.245,17.86 88.685,17.86 88.685,16.14 86.965,16.14 ; 80.085,28.18 80.085,26.46 81.805,26.46 81.805,29.9 80.085,29.9 80.085,31.62 83.525,31.62 83.525,29.9 85.245,29.9 85.245,31.62 88.685,31.62 88.685,29.9 86.965,29.9 ; 80.085,62.58 80.085,60.86 81.805,60.86 81.805,64.3 80.085,64.3 80.085,66.02 85.245,66.02 85.245,64.3 83.525,64.3 83.525,60.86 85.245,60.86 85.245,62.58 86.965,62.591 ; 85.245,48.82 83.525,48.82 83.525,47.1 86.965,47.1 86.965,48.82 88.685,48.82 88.685,45.38 86.99,45.38 86.99,43.66 88.71,43.66 88.71,40.22 86.99,40.22 86.99,41.94 ; 85.245,57.409 86.965,57.42 86.965,59.14 88.685,59.14 88.685,55.7 86.965,55.7 86.965,53.98 88.685,53.98 88.685,50.54 86.965,50.54 86.965,52.26 83.525,52.26 83.525,50.54 85.245,50.54 85.256,48.82 ; 85.245,69.46 83.525,69.46 83.525,67.74 86.965,67.74 86.965,69.46 88.685,69.46 88.685,66.02 86.965,66.02 86.965,64.3 88.685,64.3 88.685,60.86 86.965,60.86 86.965,62.58 ; 85.245,78.049 86.965,78.06 86.965,79.78 88.685,79.78 88.685,76.34 86.965,76.34 86.965,74.62 88.685,74.62 88.685,71.18 86.965,71.18 86.965,72.9 83.525,72.9 83.525,71.18 85.245,71.18 85.256,69.46 ; 85.27,36.769 86.99,36.78 86.99,38.5 88.71,38.5 88.71,35.06 86.99,35.06 86.99,33.34 92.15,33.34 92.15,35.06 90.43,35.06 90.43,38.5 92.15,38.5 92.15,36.78 ; 86.929,98.725 86.94,97.005 88.66,97.005 88.66,95.285 85.22,95.285 85.22,97.005 83.5,97.005 83.5,91.845 85.22,91.845 85.22,93.565 88.66,93.565 88.66,91.845 86.94,91.845 ; 86.929,112.485 86.94,110.765 88.66,110.765 88.66,109.045 85.22,109.045 85.22,110.765 83.5,110.765 83.5,105.605 85.22,105.605 85.22,107.325 88.66,107.325 88.66,105.605 86.94,105.605 ; 86.954,16.14 86.965,14.42 88.685,14.42 88.685,12.7 85.245,12.7 85.245,14.42 83.525,14.42 83.525,9.26 85.245,9.26 85.245,10.98 88.685,10.98 88.685,9.26 86.965,9.26 ; 86.954,29.9 86.965,28.18 88.685,28.18 88.685,26.46 85.245,26.46 85.245,28.18 83.525,28.18 83.525,23.02 85.245,23.02 85.245,24.74 88.685,24.74 88.685,23.02 86.965,23.02 ; 86.965,83.22 86.965,81.5 88.685,81.5 88.685,84.94 86.965,84.94 86.965,86.66 92.125,86.66 92.125,84.94 90.405,84.94 90.405,81.5 92.125,81.5 92.125,83.22 93.845,83.231 ; 92.125,78.049 93.845,78.06 93.845,79.78 95.565,79.78 95.565,76.34 93.845,76.34 93.845,74.62 97.285,74.62 97.285,76.34 99.005,76.34 99.005,74.62 102.445,74.62 102.445,76.34 100.725,76.34 100.714,78.06 ; 92.125,78.06 92.125,79.78 90.405,79.78 90.405,76.34 92.125,76.34 92.125,74.62 90.43,74.62 90.43,71.18 92.15,71.18 92.15,72.9 95.59,72.9 95.59,71.18 93.87,71.18 ; 92.15,36.769 93.87,36.78 93.87,38.5 95.59,38.5 95.59,35.06 93.87,35.06 93.87,33.34 97.31,33.34 97.31,35.06 99.03,35.06 99.03,33.34 102.47,33.34 102.47,35.06 100.75,35.06 100.739,36.78 ; 92.15,57.409 93.87,57.42 93.87,59.14 95.59,59.14 95.59,55.7 93.87,55.7 93.87,53.98 99.03,53.98 99.03,55.7 97.31,55.7 97.31,59.14 99.03,59.14 99.03,57.42 ; 92.15,57.42 92.15,59.14 90.43,59.14 90.43,55.7 92.15,55.7 92.15,53.98 90.43,53.98 90.43,50.54 92.15,50.54 92.15,52.26 95.59,52.26 95.59,50.54 93.87,50.54 ; 92.15,90.1 90.43,90.1 90.43,88.38 93.87,88.38 93.87,90.1 95.59,90.1 95.59,88.38 99.03,88.38 99.03,90.1 97.31,90.1 97.31,93.54 99.03,93.54 99.03,91.82 ; 92.15,96.98 90.43,96.98 90.43,95.26 93.87,95.26 93.87,96.98 95.59,96.98 95.59,91.82 93.87,91.82 93.87,93.54 90.43,93.54 90.43,91.82 92.15,91.82 92.161,90.1 ; 92.15,103.86 90.43,103.86 90.43,102.14 93.87,102.14 93.87,103.86 95.59,103.86 95.59,102.14 99.03,102.14 99.03,103.86 97.31,103.86 97.31,107.3 99.03,107.3 99.03,105.58 ; 92.15,110.74 90.43,110.74 90.43,109.02 93.87,109.02 93.87,110.74 95.59,110.74 95.59,105.58 93.87,105.58 93.87,107.3 90.43,107.3 90.43,105.58 92.15,105.58 92.161,103.86 ; 92.161,96.98 92.15,98.7 90.43,98.7 90.43,100.42 93.87,100.42 93.87,98.7 95.59,98.7 95.59,100.42 99.03,100.42 99.03,98.7 97.31,98.7 97.31,95.26 99.03,95.26 99.03,96.98 100.75,96.991 ; 92.161,110.74 92.15,112.46 90.43,112.46 90.43,114.18 93.87,114.18 93.87,112.46 95.59,112.46 95.59,114.18 99.03,114.18 99.03,112.46 97.31,112.46 97.31,109.02 99.03,109.02 99.03,110.74 100.75,110.751 ; 92.175,7.515 90.455,7.515 90.455,5.795 93.895,5.795 93.895,7.515 95.615,7.515 95.615,5.795 99.055,5.795 99.055,7.515 97.335,7.515 97.335,10.955 99.055,10.955 99.055,9.235 ; 92.175,14.395 90.455,14.395 90.455,12.675 93.895,12.675 93.895,14.395 95.615,14.395 95.615,9.235 93.895,9.235 93.895,10.955 90.455,10.955 90.455,9.235 92.175,9.235 92.186,7.515 ; 92.175,21.275 90.455,21.275 90.455,19.555 93.895,19.555 93.895,21.275 95.615,21.275 95.615,19.555 99.055,19.555 99.055,21.275 97.335,21.275 97.335,24.715 99.055,24.715 99.055,22.995 ; 92.175,28.155 90.455,28.155 90.455,26.435 93.895,26.435 93.895,28.155 95.615,28.155 95.615,22.995 93.895,22.995 93.895,24.715 90.455,24.715 90.455,22.995 92.175,22.995 92.186,21.275 ; 92.186,14.395 92.175,16.115 90.455,16.115 90.455,17.835 93.895,17.835 93.895,16.115 95.615,16.115 95.615,17.835 99.055,17.835 99.055,16.115 97.335,16.115 97.335,12.675 99.055,12.675 99.055,14.395 100.775,14.406 ; 92.186,28.155 92.175,29.875 90.455,29.875 90.455,31.595 93.895,31.595 93.895,29.875 95.615,29.875 95.615,31.595 99.055,31.595 99.055,29.875 97.335,29.875 97.335,26.435 99.055,26.435 99.055,28.155 100.775,28.166 ; 93.845,83.22 93.845,81.5 95.565,81.5 95.565,84.94 93.845,84.94 93.845,86.66 97.285,86.66 97.285,84.94 99.005,84.94 99.005,86.66 102.445,86.66 102.445,84.94 100.725,84.94 ; 93.859,50.54 93.87,48.82 95.59,48.82 95.59,47.1 92.15,47.1 92.15,48.82 90.43,48.82 90.43,45.38 92.15,45.38 92.15,43.66 90.43,43.66 90.43,40.22 92.15,40.22 92.15,41.94 93.87,41.951 ; 93.859,71.18 93.87,69.46 95.59,69.46 95.59,67.74 92.15,67.74 92.15,69.46 90.43,69.46 90.43,66.02 92.15,66.02 92.15,64.3 90.43,64.3 90.43,60.86 92.15,60.86 92.15,62.58 93.87,62.591 ; 93.87,41.94 93.87,40.22 95.59,40.22 95.59,43.66 93.87,43.66 93.87,45.38 97.31,45.38 97.31,43.66 99.03,43.66 99.03,45.38 102.47,45.38 102.47,43.66 100.75,43.66 ; 93.87,62.58 93.87,60.86 95.59,60.86 95.59,64.3 93.87,64.3 93.87,66.02 99.03,66.02 99.03,64.3 97.31,64.3 97.31,60.86 99.03,60.86 99.03,62.58 100.75,62.591 ; 99.03,48.82 97.31,48.82 97.31,47.1 100.75,47.1 100.75,48.82 102.47,48.82 102.47,47.1 104.19,47.1 104.19,48.82 105.91,48.82 105.91,47.1 109.35,47.1 109.35,48.82 107.63,48.82 107.619,50.54 ; 99.03,57.409 100.75,57.42 100.75,59.14 102.47,59.14 102.47,55.7 100.75,55.7 100.75,53.98 102.47,53.98 102.47,50.54 100.75,50.54 100.75,52.26 97.31,52.26 97.31,50.54 99.03,50.54 99.041,48.82 ; 99.03,69.46 97.31,69.46 97.31,67.74 100.75,67.74 100.75,69.46 102.47,69.46 102.47,66.02 100.75,66.02 100.75,64.3 102.47,64.3 102.47,60.86 100.75,60.86 100.75,62.58 ; 99.03,91.809 100.75,91.82 100.75,93.54 102.47,93.54 102.47,90.1 100.75,90.1 100.75,88.38 104.19,88.38 104.19,90.1 105.91,90.1 105.91,88.38 109.35,88.38 109.35,90.1 107.63,90.1 107.619,91.82 ; 99.03,105.569 100.75,105.58 100.75,107.3 102.47,107.3 102.47,103.86 100.75,103.86 100.75,102.14 102.47,102.14 102.47,100.42 100.75,100.42 100.75,98.7 102.47,98.7 102.47,95.26 100.75,95.26 100.75,96.98 ; 99.041,69.46 99.03,71.18 97.31,71.18 97.31,72.9 100.75,72.9 100.75,71.18 102.47,71.18 102.47,72.9 104.19,72.9 104.19,71.18 105.91,71.18 105.91,72.9 109.35,72.9 109.35,71.18 107.63,71.18 ; 99.055,9.224 100.775,9.235 100.775,10.955 102.495,10.955 102.495,7.515 100.775,7.515 100.775,5.795 104.215,5.795 104.215,7.515 105.935,7.515 105.935,5.795 109.375,5.795 109.375,7.515 107.655,7.515 107.644,9.235 ; 99.055,22.984 100.775,22.995 100.775,24.715 102.495,24.715 102.495,21.275 100.775,21.275 100.775,19.555 102.495,19.555 102.495,17.835 100.775,17.835 100.775,16.115 102.495,16.115 102.495,12.675 100.775,12.675 100.775,14.395 ; 100.714,84.94 100.725,83.22 102.445,83.22 102.445,81.5 99.005,81.5 99.005,83.22 97.285,83.22 97.285,78.06 99.005,78.06 99.005,79.78 102.445,79.78 102.445,78.06 100.725,78.06 ; 100.739,43.66 100.75,41.94 102.47,41.94 102.47,40.22 99.03,40.22 99.03,41.94 97.31,41.94 97.31,36.78 99.03,36.78 99.03,38.5 102.47,38.5 102.47,36.78 100.75,36.78 ; 100.75,110.74 100.75,109.02 102.47,109.02 102.47,112.46 100.75,112.46 100.75,114.18 104.19,114.18 104.19,112.485 105.91,112.485 105.91,114.205 109.35,114.205 109.35,112.485 107.63,112.485 ; 100.775,28.155 100.775,26.435 102.495,26.435 102.495,29.875 100.775,29.875 100.775,31.595 104.215,31.595 104.215,29.9 105.935,29.9 105.935,31.62 109.375,31.62 109.375,29.9 107.655,29.9 ; 105.91,57.409 107.63,57.42 107.63,59.14 109.35,59.14 109.35,55.7 107.63,55.7 107.63,53.98 112.79,53.98 112.79,55.7 111.07,55.7 111.07,59.14 112.79,59.14 112.79,57.42 ; 105.91,57.42 105.91,59.14 104.19,59.14 104.19,55.7 105.91,55.7 105.91,53.98 104.19,53.98 104.19,50.54 105.91,50.54 105.91,52.26 109.35,52.26 109.35,50.54 107.63,50.54 ; 105.91,76.34 104.19,76.34 104.19,74.62 107.63,74.62 107.63,76.34 109.35,76.34 109.35,74.62 112.79,74.62 112.79,76.34 111.07,76.34 111.07,79.78 112.79,79.78 112.79,78.06 ; 105.91,83.22 104.19,83.22 104.19,81.5 107.63,81.5 107.63,83.22 109.35,83.22 109.35,78.06 107.63,78.06 107.63,79.78 104.19,79.78 104.19,78.06 105.91,78.06 105.921,76.34 ; 105.91,98.689 107.63,98.7 107.63,100.42 109.35,100.42 109.35,96.98 107.63,96.98 107.63,95.26 112.79,95.26 112.79,96.98 111.07,96.98 111.07,100.42 112.79,100.42 112.79,98.7 ; 105.91,98.7 105.91,100.42 104.19,100.42 104.19,96.98 105.91,96.98 105.91,95.26 104.19,95.26 104.19,91.82 105.91,91.82 105.91,93.54 109.35,93.54 109.35,91.82 107.63,91.82 ; 105.921,83.22 105.91,84.94 104.19,84.94 104.19,86.66 107.63,86.66 107.63,84.94 109.35,84.94 109.35,86.66 112.79,86.66 112.79,84.94 111.07,84.94 111.07,81.5 112.79,81.5 112.79,83.22 114.51,83.231 ; 105.935,16.104 107.655,16.115 107.655,17.835 109.375,17.835 109.375,14.395 107.655,14.395 107.655,12.675 112.815,12.675 112.815,14.395 111.095,14.395 111.095,17.835 112.815,17.835 112.815,16.115 ; 105.935,16.115 105.935,17.835 104.215,17.835 104.215,14.395 105.935,14.395 105.935,12.675 104.215,12.675 104.215,9.235 105.935,9.235 105.935,10.955 109.375,10.955 109.375,9.235 107.655,9.235 ; 105.935,35.06 104.215,35.06 104.215,33.34 107.655,33.34 107.655,35.06 109.375,35.06 109.375,33.34 112.815,33.34 112.815,35.06 111.095,35.06 111.095,38.5 112.815,38.5 112.815,36.78 ; 105.935,41.94 104.215,41.94 104.215,40.22 107.655,40.22 107.655,41.94 109.375,41.94 109.375,36.78 107.655,36.78 107.655,38.5 104.215,38.5 104.215,36.78 105.935,36.78 105.946,35.06 ; 105.946,41.94 105.935,43.66 104.215,43.66 104.215,45.38 107.655,45.38 107.655,43.66 109.375,43.66 109.375,45.38 112.815,45.38 112.815,43.66 111.095,43.66 111.095,40.22 112.815,40.22 112.815,41.94 114.535,41.951 ; 107.619,71.18 107.63,69.46 109.35,69.46 109.35,67.74 105.91,67.74 105.91,69.46 104.19,69.46 104.19,66.02 105.91,66.02 105.91,64.3 104.19,64.3 104.19,60.86 105.91,60.86 105.91,62.58 107.63,62.591 ; 107.619,112.485 107.63,110.765 109.35,110.765 109.35,109.045 105.91,109.045 105.91,110.765 104.19,110.765 104.19,107.325 105.91,107.325 105.91,105.605 104.19,105.605 104.19,102.165 105.91,102.165 105.91,103.885 107.63,103.896 ; 107.63,62.58 107.63,60.86 109.35,60.86 109.35,64.3 107.63,64.3 107.63,66.02 112.79,66.02 112.79,64.3 111.07,64.3 111.07,60.86 112.79,60.86 112.79,62.58 114.51,62.591 ; 107.63,103.885 107.63,102.165 109.35,102.165 109.35,105.605 107.63,105.605 107.63,107.325 112.79,107.325 112.79,105.605 111.07,105.605 111.07,102.165 112.79,102.165 112.79,103.885 114.51,103.896 ; 107.644,29.9 107.655,28.18 109.375,28.18 109.375,26.46 105.935,26.46 105.935,28.18 104.215,28.18 104.215,24.74 105.935,24.74 105.935,23.02 104.215,23.02 104.215,19.58 105.935,19.58 105.935,21.3 107.655,21.311 ; 107.655,21.3 107.655,19.58 109.375,19.58 109.375,23.02 107.655,23.02 107.655,24.74 112.815,24.74 112.815,23.02 111.095,23.02 111.095,19.58 112.815,19.58 112.815,21.3 114.535,21.311 ; 112.79,48.82 111.07,48.82 111.07,47.1 114.51,47.1 114.51,48.82 116.23,48.82 116.23,45.38 114.535,45.38 114.535,43.66 116.255,43.66 116.255,40.22 114.535,40.22 114.535,41.94 ; 112.79,57.409 114.51,57.42 114.51,59.14 116.23,59.14 116.23,55.7 114.51,55.7 114.51,53.98 116.23,53.98 116.23,50.54 114.51,50.54 114.51,52.26 111.07,52.26 111.07,50.54 112.79,50.54 112.801,48.82 ; 112.79,69.46 111.07,69.46 111.07,67.74 114.51,67.74 114.51,69.46 116.23,69.46 116.23,66.02 114.51,66.02 114.51,64.3 116.23,64.3 116.23,60.86 114.51,60.86 114.51,62.58 ; 112.79,78.049 114.51,78.06 114.51,79.78 116.23,79.78 116.23,76.34 114.51,76.34 114.51,74.62 116.23,74.62 116.23,71.18 114.51,71.18 114.51,72.9 111.07,72.9 111.07,71.18 112.79,71.18 112.801,69.46 ; 112.79,90.1 111.07,90.1 111.07,88.38 114.51,88.38 114.51,90.1 116.23,90.1 116.23,86.66 114.51,86.66 114.51,84.94 116.23,84.94 116.23,81.5 114.51,81.5 114.51,83.22 ; 112.79,98.689 114.51,98.7 114.51,100.42 116.23,100.42 116.23,96.98 114.51,96.98 114.51,95.26 116.23,95.26 116.23,91.82 114.51,91.82 114.51,93.54 111.07,93.54 111.07,91.82 112.79,91.82 112.801,90.1 ; 112.79,110.765 111.07,110.765 111.07,109.045 114.51,109.045 114.51,110.765 116.23,110.765 116.23,107.325 114.51,107.325 114.51,105.605 116.23,105.605 116.23,102.165 114.51,102.165 114.51,103.885 ; 112.801,110.765 112.79,112.485 111.07,112.485 111.07,114.205 114.51,114.205 114.51,112.485 116.23,112.485 ; 112.815,7.515 111.095,7.515 111.095,5.795 114.535,5.795 114.535,7.515 116.255,7.515 ; 112.815,16.104 114.535,16.115 114.535,17.835 116.255,17.835 116.255,14.395 114.535,14.395 114.535,12.675 116.255,12.675 116.255,9.235 114.535,9.235 114.535,10.955 111.095,10.955 111.095,9.235 112.815,9.235 112.826,7.515 ; 112.815,28.18 111.095,28.18 111.095,26.46 114.535,26.46 114.535,28.18 116.255,28.18 116.255,24.74 114.535,24.74 114.535,23.02 116.255,23.02 116.255,19.58 114.535,19.58 114.535,21.3 ; 112.815,36.769 114.535,36.78 114.535,38.5 116.255,38.5 116.255,35.06 114.535,35.06 114.535,33.34 116.255,33.34 116.255,29.9 114.535,29.9 114.535,31.62 111.095,31.62 111.095,29.9 112.815,29.9 112.826,28.18 ; 116.23,112.485 116.23,113.258 ; 116.23,112.485 119.47,112.485 120.243,113.258 ; 116.23,113.258 116.23,114.031 120.984,114.031 121,114.015 120.243,113.258 ; 116.23,113.258 120.243,113.258 ; 116.255,6.655 116.255,7.515 ; 116.255,6.655 116.255,5.795 120.135,5.795 120.995,6.655 ; 116.255,6.655 120.995,6.655 ; 116.255,7.515 120.145,7.515 121,6.66 120.995,6.655
  Top Layer w2: 5.795,6.195 5.795,113.795
  Top Layer w4: 121,7.5 Designator16.1@121,50 ; Designator15.1@121,70 121,112.5
ntc+: Designator21.1 NTC.1 | length 3.4
  Top Layer w1.17: NTC.1@118,58.857 118.012,58.845 119.431,58.845 120.275,58 Designator21.1@121,58
ntc-: Designator20.1 NTC.2 | length 3.4
  Top Layer w1.17: NTC.2@118,61.143 118.012,61.155 119.431,61.155 120.275,62 Designator20.1@121,62

## Keep-outs
Keep-Out Layer:
  lines w0.254: 0,2.5 0,117.5 cw(c2.5,117.5) 2.5,120 122.5,120 cw(c122.5,117.5) 125,117.5 ; 0,2.5 ccw(c2.5,2.5) 2.5,0 122.5,0 ccw(c122.5,2.5) 125,2.5 ; 125,2.5 125,117.5

## Silkscreen, mask and mechanical layers (free items; w line width, h text height)
Top Overlay:
  lines w0.254: 4.819,5.105 116.91,5.105 116.91,114.859 4.819,114.859 4.819,5.105